# Altium PCB HX711.PcbDoc
Units mil, origin at the board's own origin, x right, y up, seen from the top; angles counter-clockwise.
Board outline 2910 x 2065 mil, 2 copper layers (Top Layer, Bottom Layer); 12 components, 11 nets, 41 pads, 0 vias.
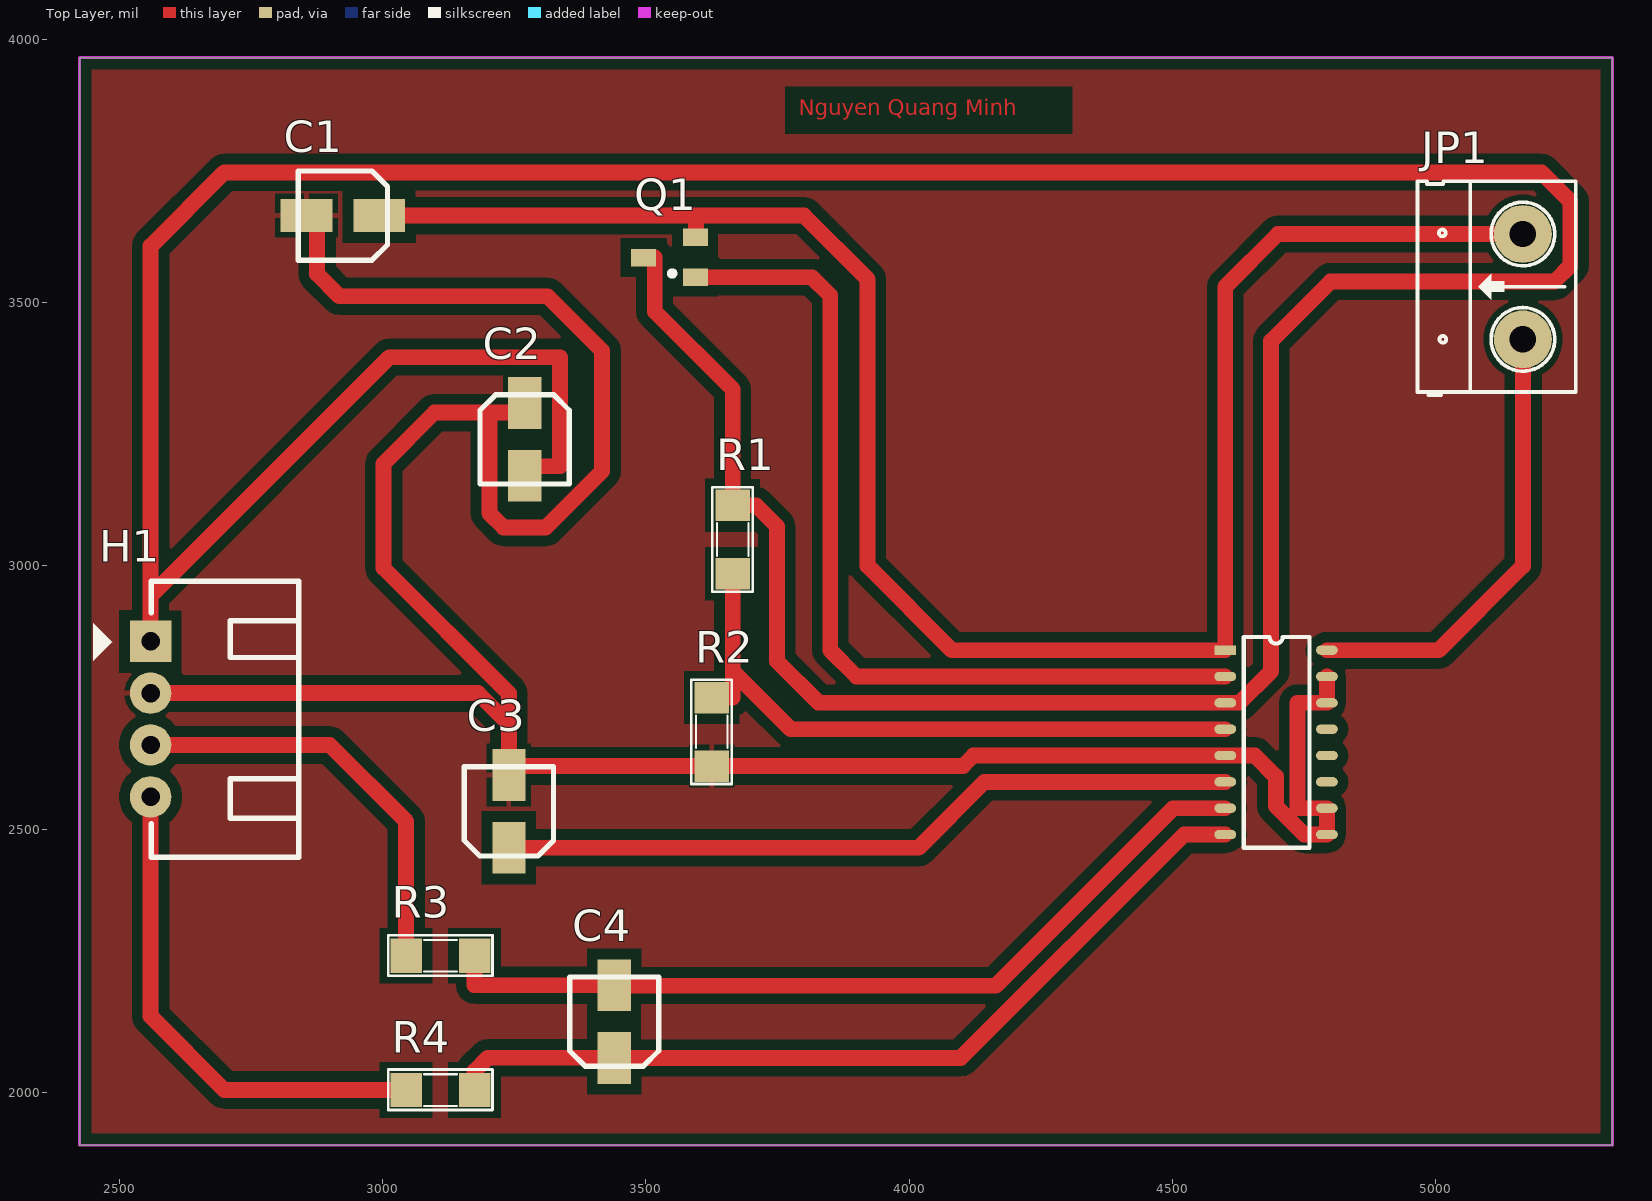
[diagram p0: Top Layer view]
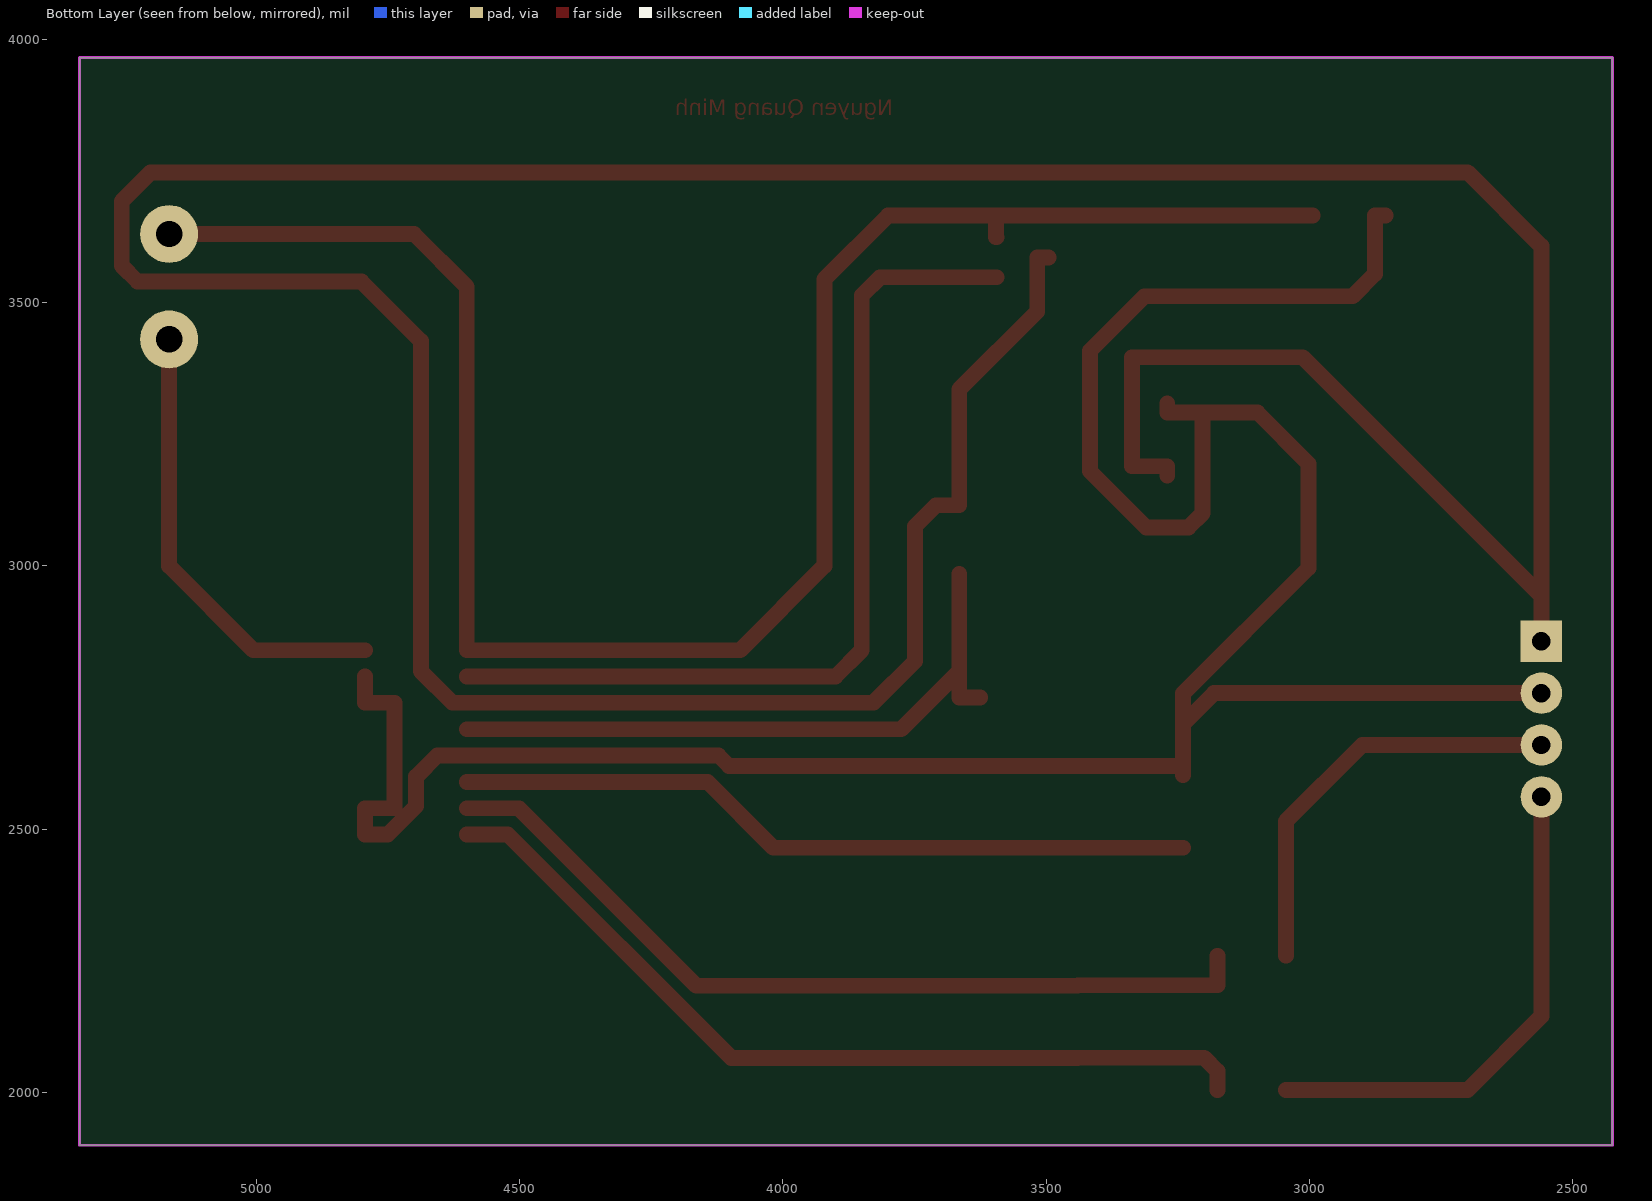
[diagram p1: Bottom Layer view, seen from below]
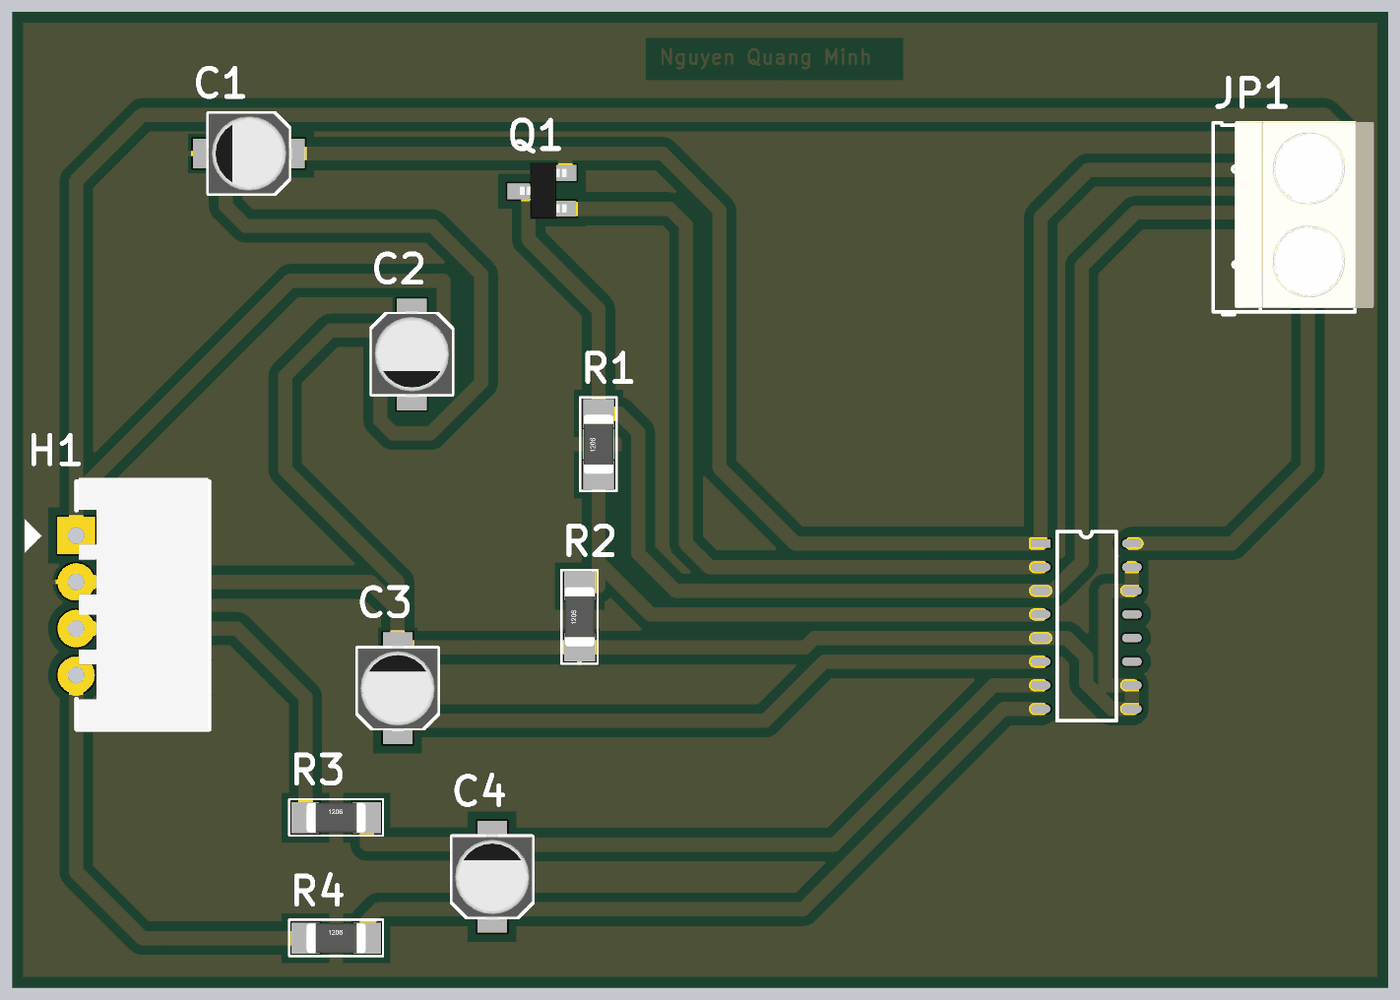
[diagram p2: 3D render of the assembled board from above, using the file's embedded part models]

## Layer stack, top to bottom
Top Solder: solder mask 0.4, Solder Resist, Dk 3.5
Top Layer: signal copper 1.4
Dielectric 1: dielectric 12.6, FR-4, Dk 4.8
Bottom Layer: signal copper 1.4
Bottom Solder: solder mask 0.4, Solder Resist, Dk 3.5

## Board outline
2425,1900 5335,1900 5335,3965 2425,3965

## Design rules (kind name [scope] priority, off if disabled: settings)
Clearance [All] p1: gap=20 ignorepadtopadclearanceinfootprint=FALSE
PolygonConnect [All] p1: connectstyle=Relief reliefconductorwidth=10 reliefentries=4 polygonreliefangle="90 Angle" airgapwidth=10
RoomDefinition HX711 [InComponentClass('HX711')] p1: confinementstyle=ConfineIn formatcopy=TRUE lockcomponents=FALSE outline 7045,1060 10215,1060 10215,1710 7045,1710
RoutingLayers [All] p1: top layer_v5=TRUE bottom layer_v5=FALSE
RoutingVias [All] p1: holewidth=28 width=50 viastyle="Through Hole" minholewidth=28 minwidth=50 maxholewidth=28 maxwidth=50
SolderMaskExpansion [All] p1: expansion=4 istentingtop=FALSE
Width [All] p1: maxlimit=35 minlimit=25 preferedwidth=30
29 further rules are at their usual default settings.

## Classes and differential pairs
component class HX711: C1 C2 C3 C4 H1 JP1 Q1 R1 R2 R3 R4

## Components (designator, comment, footprint, x,y, rotation, side; value= is the part's Value field where it differs from the comment)
* "HX711" HX711 4600,2840 r0 top
C1 "10uF" "tu nhom 4 (b)" 2925,3665 r180 top
C2 "10uF" "tu nhom 4 (b)" 3270,3240 r270 top
C3 "0.1uF" "tu nhom 4 (b)" 3240,2533.9 r90 top
C4 "0.1uF" "tu nhom 4 (B)" 3440,2135 r90 top
H1 "Header 4P 2.54 Duc Cong" "Header 4P DC 2.54" 2561,2855.85 r0 top
JP1 "Header 2_1" HED2 5165,3430 r90 top value="Header 2"
Q1 "BA" SOT23 3545,3585 r90 top
R1 "100" SM-RES-1206 3665,2985 r90 top value="R1/4W - 1K"
R2 "100" SM-RES-1206 3625,2620 r90 top value="R1/4W - 1K"
R3 "100" SM-RES-1206 3045,2260 r0 top value="R1/4W - 1K"
R4 "100" SM-RES-1206 3045,2005 r0 top value="R1/4W - 1K"

## Footprints (in the part's own frame and the unit in brackets; to place one, negate y for a bottom-side part, rotate by r counter-clockwise, add the part's x,y. Pads: shape width x height; smd on the part's side, far side on the other; paste and mask are expansions set on the pad)
"Header 4P DC 2.54" [mil]
  rect 78.74x78.74 hole 35: 1(-1,1)
  round 78.74 hole 35: 2(-1,-97.42) 3(-1,-195.85) 4(-1,-294.28)
  silkscreen extent -110,-409 280,115, body extent 5,-413 278,123, height 290
HED2 [mil] "Header 2, 2 pin, hight 300mil, Pin to Pin 200, Colour Green"
  round 110 hole 50: 1(0,0) 2(200,0)
  silkscreen extent -106,-100 300,200, body extent -92,-140 302,155, height 394
HX711 [mm]
  rect 1.05x0.45 smd: 1(0,0)
  oval 1.05x0.45 smd: 2(0,-1.27) 3(0,-2.54) 4(0,-3.81) 5(0,-5.08) 6(0,-6.35) 7(0,-7.62) 8(0,-8.89) 9(4.9,-8.89) 10(4.9,-7.62) 11(4.9,-6.35) 12(4.9,-5.08) 13(4.9,-3.81) 14(4.9,-2.54) 15(4.9,-1.27) 16(4.9,0)
  silkscreen extent 0.89,-9.53 4.06,0.64
SM-RES-1206 [mil]
  rect 60x65 smd: 1(0,0) 2(130,0)
  silkscreen extent -34,-38 164,39, body extent 2,-31 128,32, height 40
SOT23 [mm] "SOT 23 _ 1-3-2"
  rect 0.85x1.2 smd: 1(-0.94,-1.245) 2(0.986,-1.25) 3(0.005,1.25)
  silkscreen extent -0.88,-0.25 -0.64,0, body extent -1.47,-1.33 1.53,1.17, height 1.06
"tu nhom 4 (b)" [mm]
  rect 2.5x1.6 smd: 1(-1.75,0) 2(1.75,0)
  silkscreen extent -2.15,-2.15 2.15,2.15, body extent -2.31,-2.15 2.29,2.15, height 3.91
"tu nhom 4 (B)" [mm]
  rect 2.5x1.6 smd: 1(-1.75,0) 2(1.75,0)
  silkscreen extent -2.15,-2.15 2.15,2.15, body extent -2.31,-2.15 2.29,2.15, height 3.91

## Part data
C1 C2 C3: library part "Tu Nhom 10uF 16V", "Dán", Chung_Loai=Dán, Don_Vi=Con, Ma_Hang=MH001458, So_Chan=2, Ten_Linh_Kien="Tụ Nhôm 10uF 16V 4x5MM"
C4: library part "Tu Nhom 1uF 50V", "Dán", Chung_Loai=Dán, Don_Vi=Con, Ma_Hang=MH007467, So_Chan=2, Ten_Linh_Kien="Tụ Nhôm 1uF 50V 4x5.4MM"
H1: "Cắm", Chung_Loai=Cắm, Don_Vi=Con, Ma_Hang=MH001310, Ten_Linh_Kien="Header 4P XH2.54-4P Đực Cong"
JP1: "Header, 2-Pin", Manufacturer="Generic Components", Class=Connector
Q1: library part "A1015 BA SMD", "PNP 600mW, ECB"
R1 R2 R3 R4: library part R, "Resistor 1/4W"

## Nets (pads, with @x,y where several pads share a name; then routed paths per layer and width w, separated by ;. In a path a pad name is that pad's centre, name@x,y a point inside that pad or via, vN(x,y) a via of type N, cw(c..) or ccw(c..) an arc to the next point about the centre after c; other vN are vias at no path point)
GND: *.5 *.9 *.10 *.14 *.15 C1.2 C2.1 C3.2 H1.2 R2.1 | length 5209.1
  Top Layer w30: H1.2 3181.57,2758.43 3240,2700 ; C1.2 2876,3665 2876,3554 2918,3512 3313.43,3512 3416.91,3408.52 3416.91,3179.91 3310,3073 3230,3073 3203,3100 3203,3291 ; C3.2 C3.2@3240,2620 ; C2.1 3270,3291 3203,3291 ; *.15 *.14 4737,2740 4737,2540 *.10 *.9 4750,2490 4696,2544 4696,2600 4656,2640 *.5 4122,2640 4102,2620 R2.1 C3.2@3240,2620 ; 3203,3291 3099,3291 3002,3194 3002,2996 3240,2758 3240,2700 ; C3.2@3240,2620 3240,2700
Net*_1: *.1 C1.1 JP1.2 Q1.2 | length 3608.6
  Top Layer w30: C1.1 3586,3665 ; Q1.2 3595,3623.8 3595,3656 3586,3665 ; JP1.2 4700,3630 4600,3530 *.1 4081,2840 3921,3000 3921,3544 3800,3665 3586,3665
Net*_2: *.2 Q1.1 | length 1714.4
  Top Layer w30: Q1.1 3815.29,3548 3850,3513.29 3850,2840 3900,2790 *.2
Net*_3: *.3 C2.2 H1.1 Q1.3 R1.2 | length 8063.6
  Top Layer w30: H1.1 2560,2943 ; C2.2 3270,3189 3337,3189 3337,3396 3013,3396 2560,2943 ; Q1.3 3517,3585.2 3517,3483 3665,3335 R1.2 3709,3115 3749,3075 3749,2819 3828,2740 *.3 4627,2740 4687,2800 4687,3427 4800,3540 5225,3540 5255,3570 5255,3692 5200,3747 2700,3747 2560,3607 2560,2943
Net*_4: *.4 R1.1 R2.2 | length 1255.6
  Top Layer w30: R2.2 3665,2750 3665,2800 ; R1.1 3665,2800 ; *.4 3775,2690 3665,2800
Net*_6: *.6 C3.1 | length 1411.8
  Top Layer w30: C3.1 4018,2465 4143,2590 *.6
Net*_7: *.7 C4.2 R3.2 | length 1621.6
  Top Layer w30: R3.2 3175,2203.9 C4.2 3440,2203 4164,2203 4501,2540 *.7
Net*_8: *.8 C4.1 R4.2 | length 1647.2
  Top Layer w30: R4.2 3175,2041.1 3200,2066.1 C4.1 3440,2066 4098,2066 4522,2490 *.8
Net*_16: *.16 JP1.1 | length 868.4
  Top Layer w30: *.16 5005,2840 5165,3000 JP1.1
NetH1_3: H1.3 R3.1 | length 800.1
  Top Layer w30: H1.3 2900,2660 3045,2515 R3.1
NetH1_4: H1.4 R4.1 | length 959.6
  Top Layer w30: H1.4 2560,2145 2700,2005 R4.1
pads on no net: *.11 *.12 *.13

## Polygon pours and split planes (outlines as drawn)
GND on Top Layer "GND_L01_P001" (solid, pour order 1): 2425,3965 5335,3965 5335,1900 2425,1900

## Keep-outs
Keep-Out Layer:
  lines w5: 2425,1900 2425,3965 2470,3965 5335,3965 5335,3925 5335,1900 2425,1900

## Other copper
Top Layer:
  text "Nguyen Quang Minh" at 3790,3855 h30